# Altium PCB controller_board.PcbDoc
Units mm, origin at the board's own origin, x right, y up, seen from the top; angles counter-clockwise.
Board outline 35.05 x 30.53 mm, 4 copper layers (Top Layer, Layer 1, Layer 2, Bottom Layer), stack 0.603 mm thick; 58 components, 56 nets, 255 pads, 108 vias.
Unrouted connection lines stored in the file: 42.
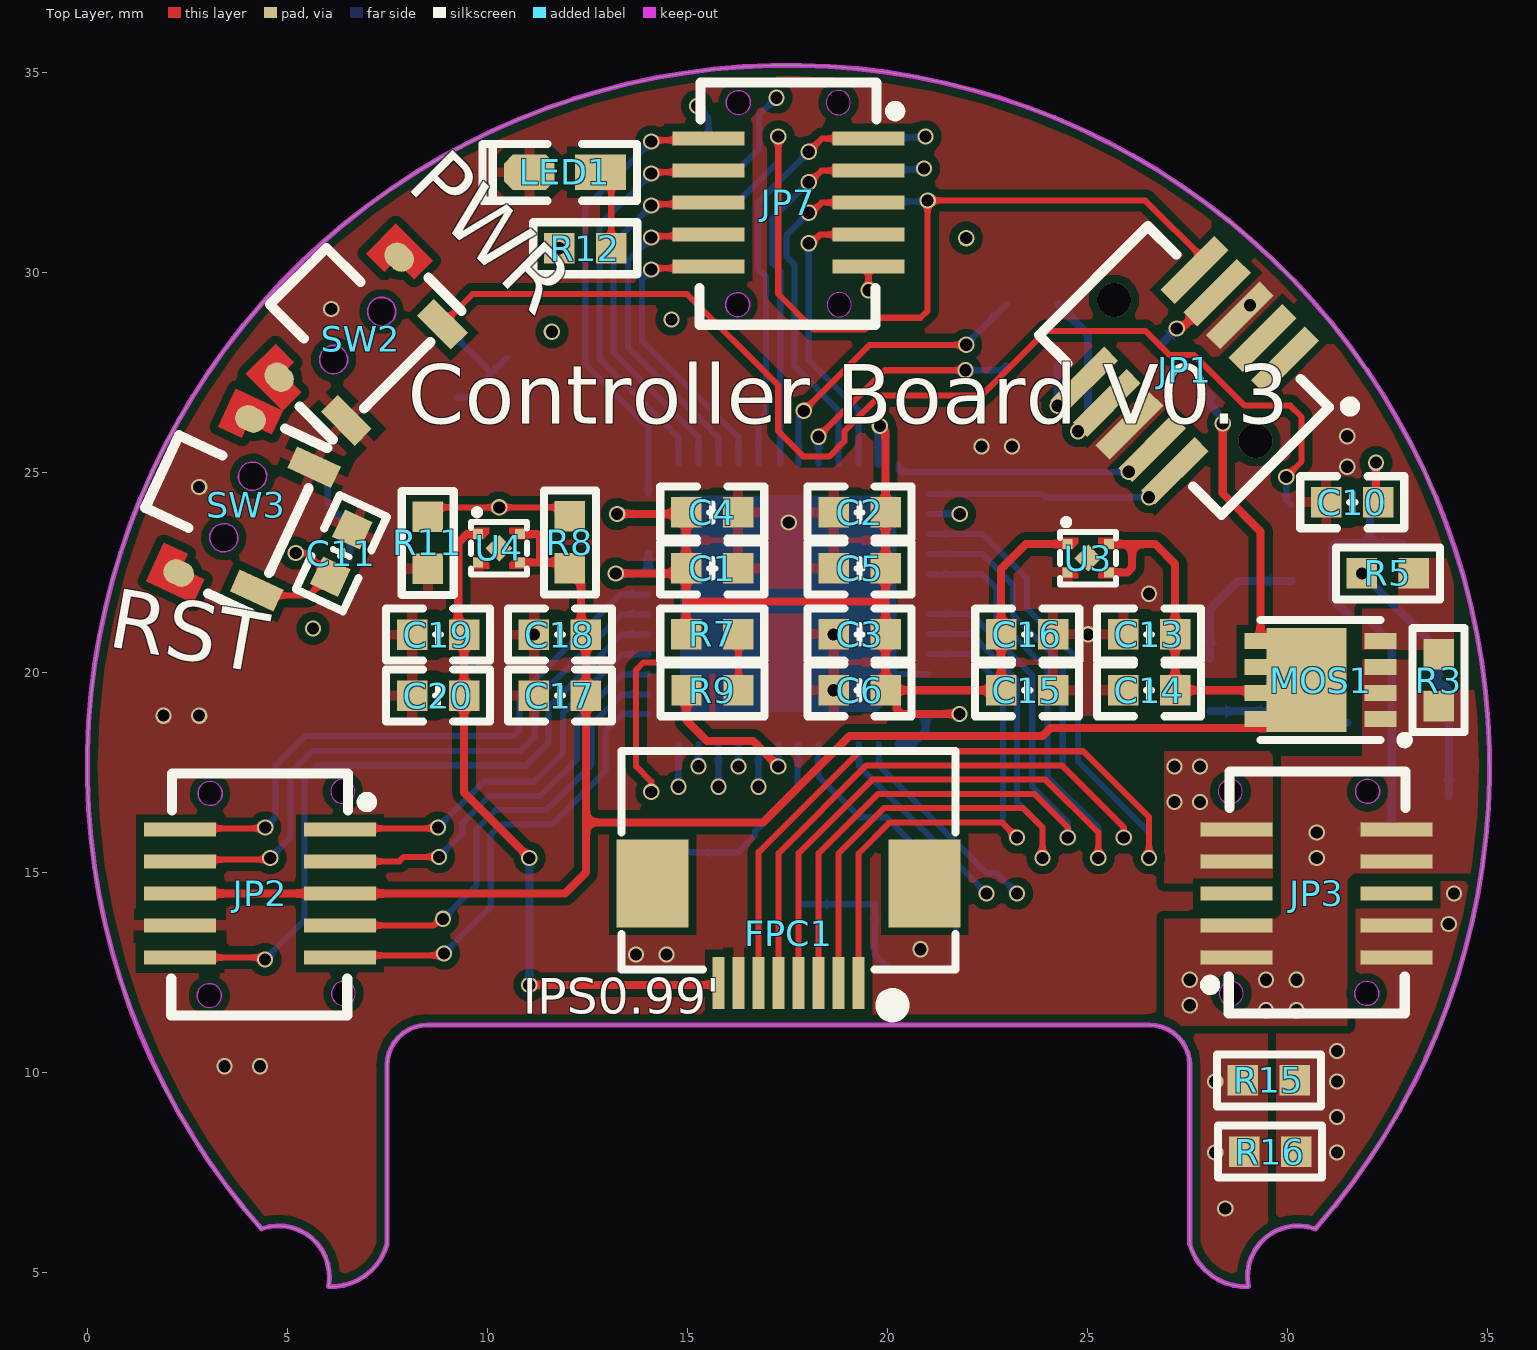
[diagram p0: Top Layer view]
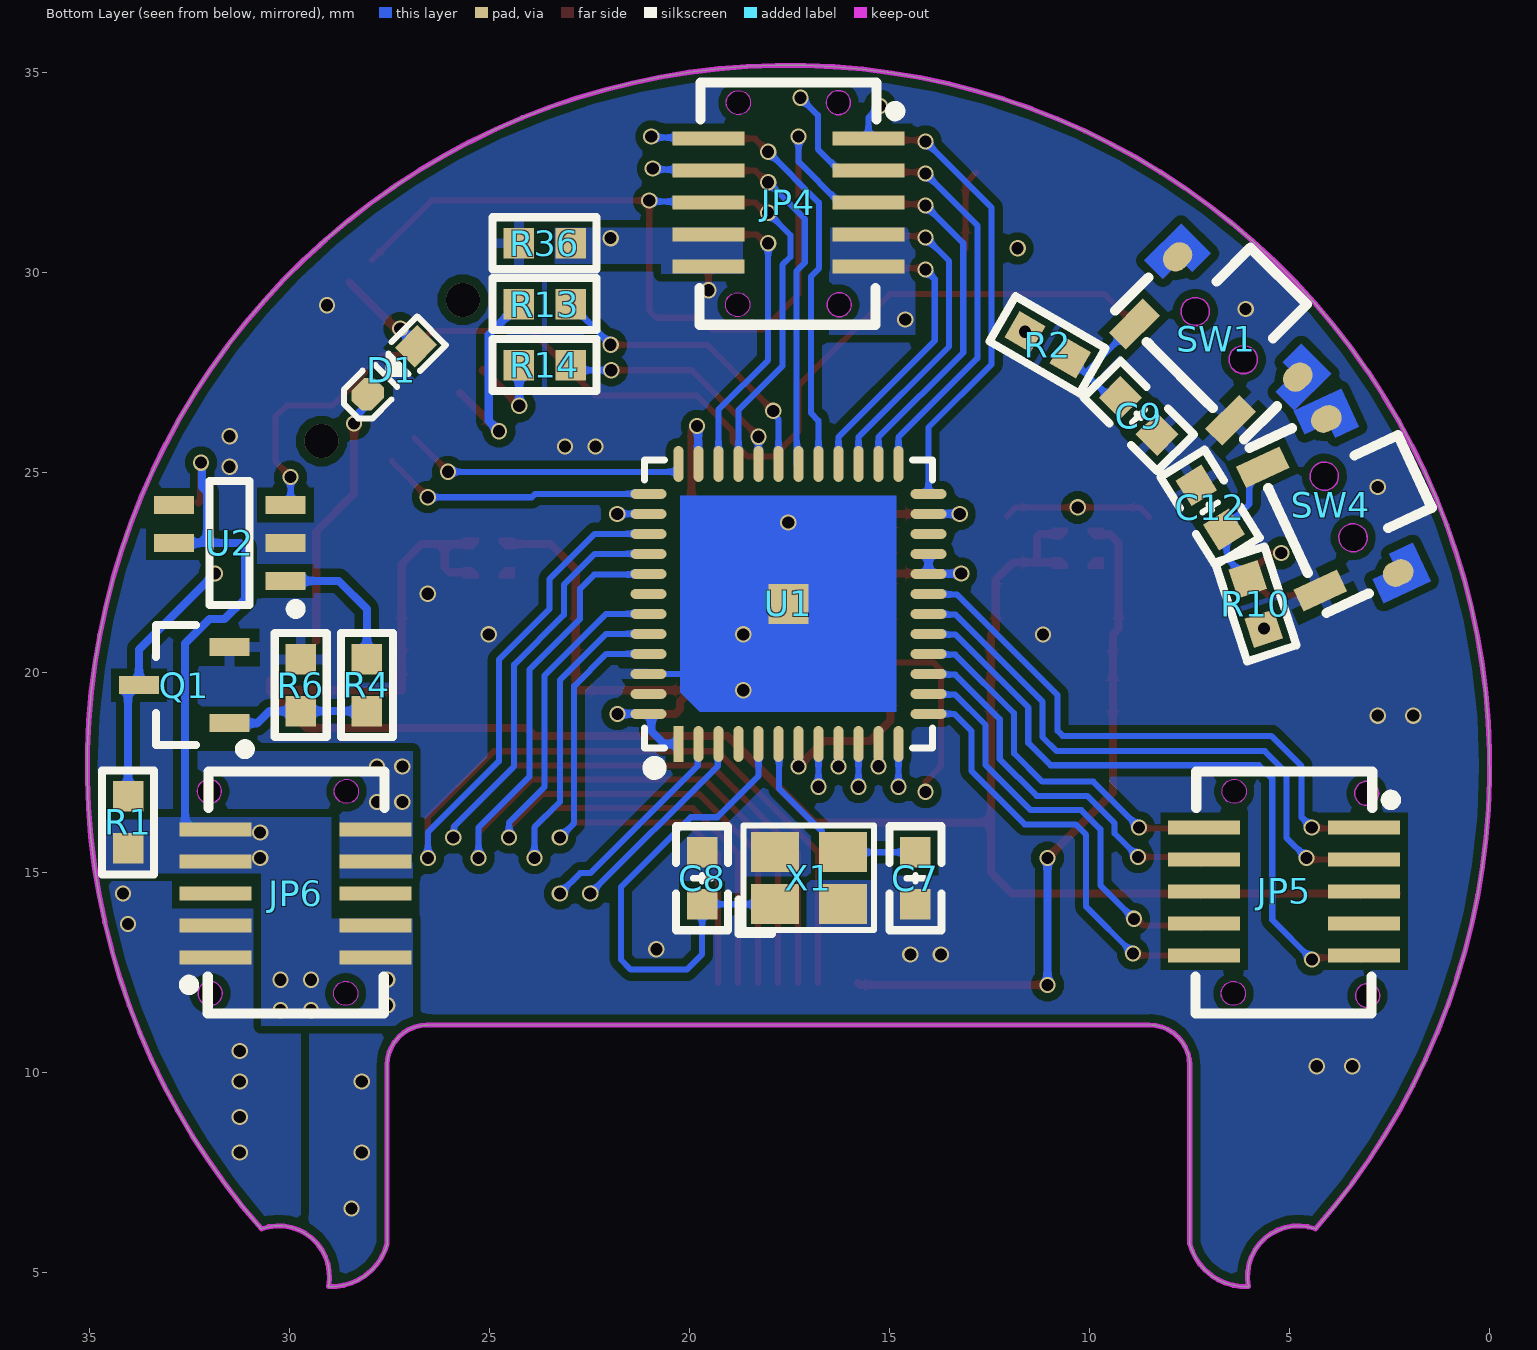
[diagram p1: Bottom Layer view, seen from below]
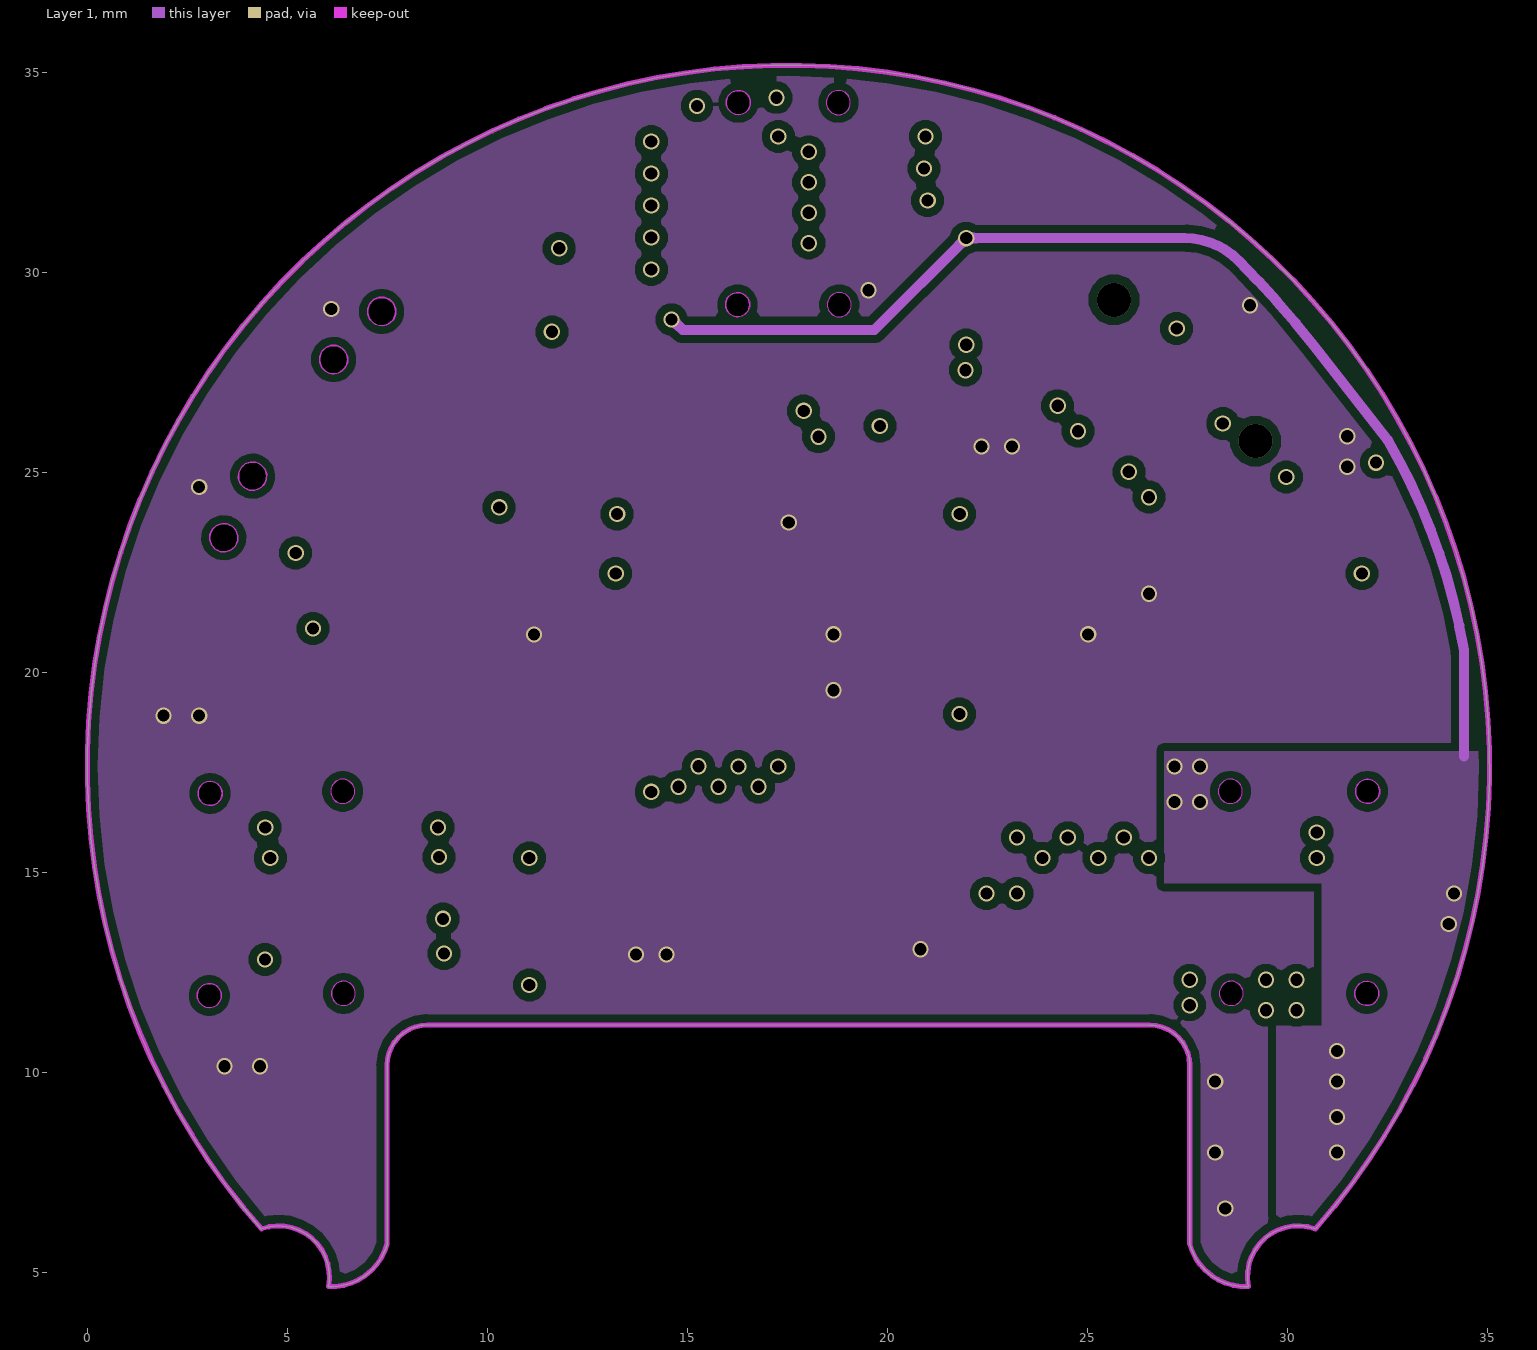
[diagram p2: Layer 1]
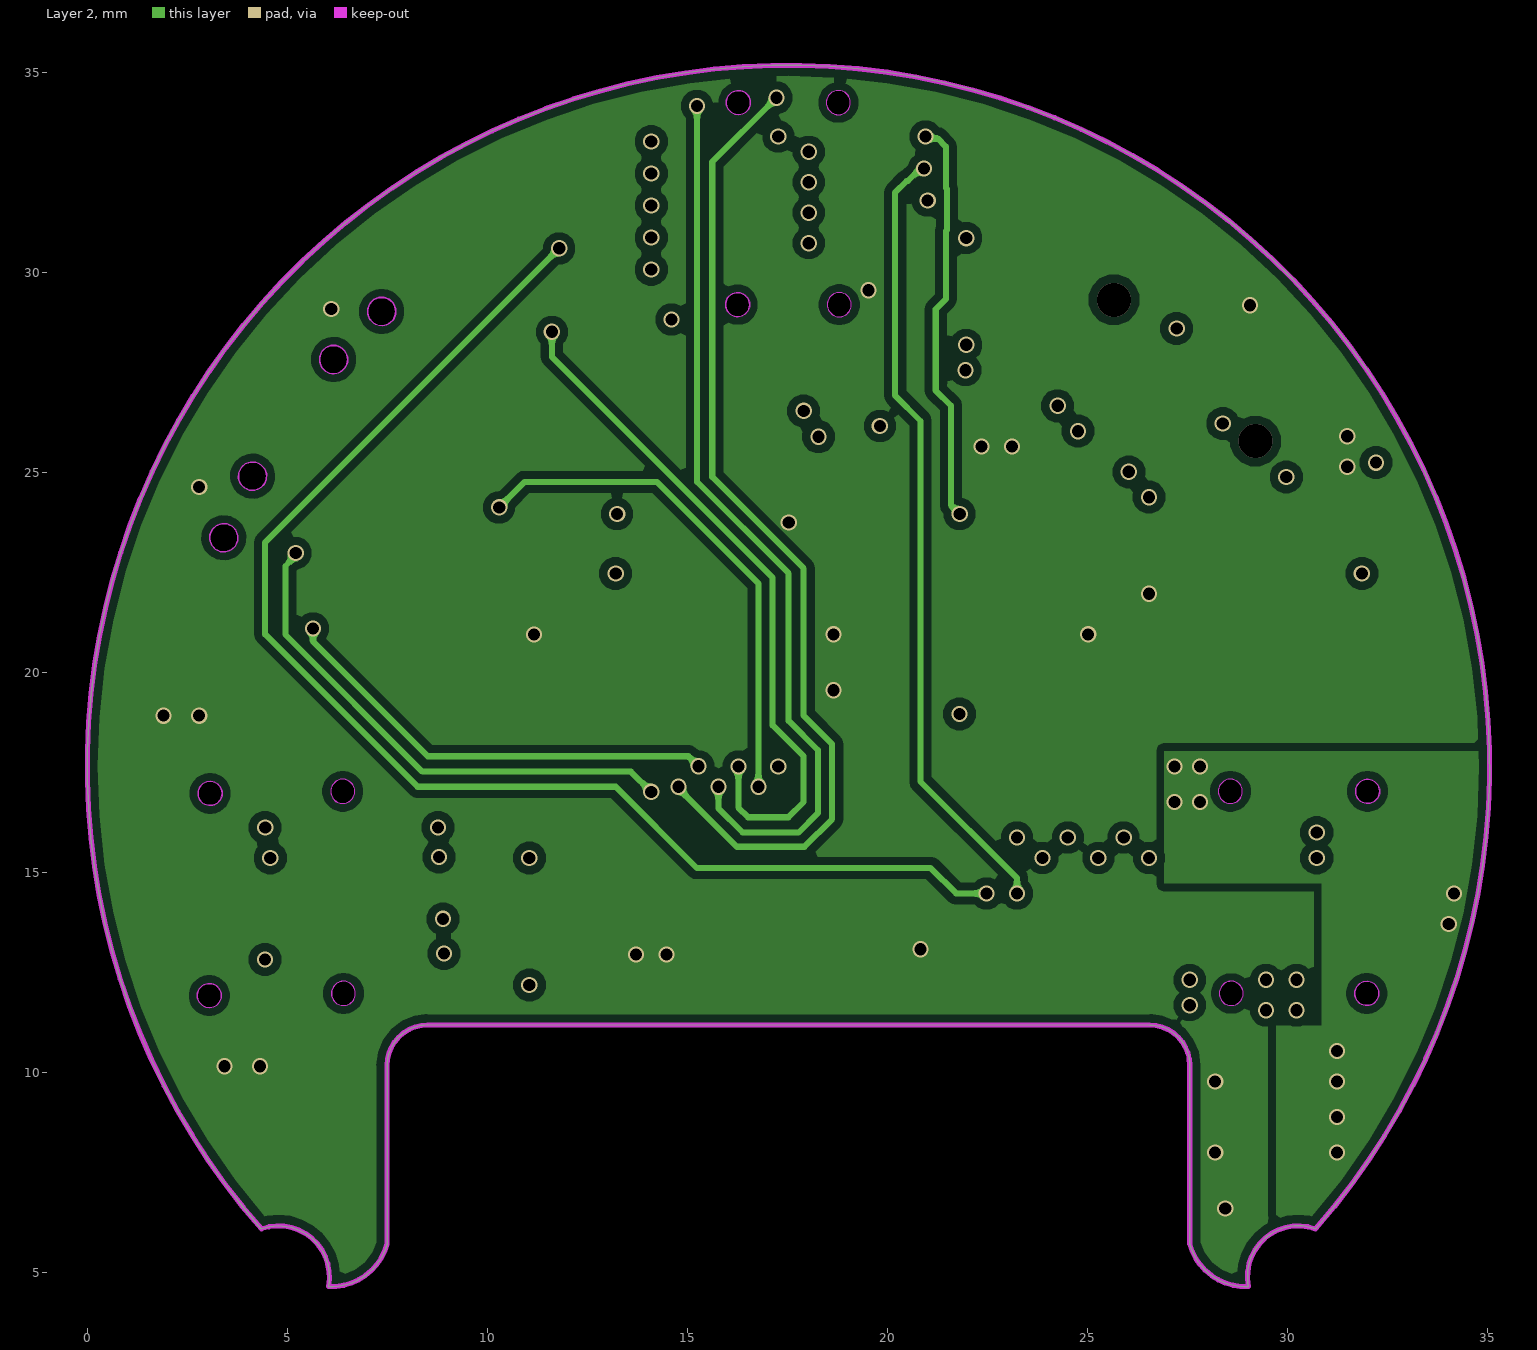
[diagram p3: Layer 2]
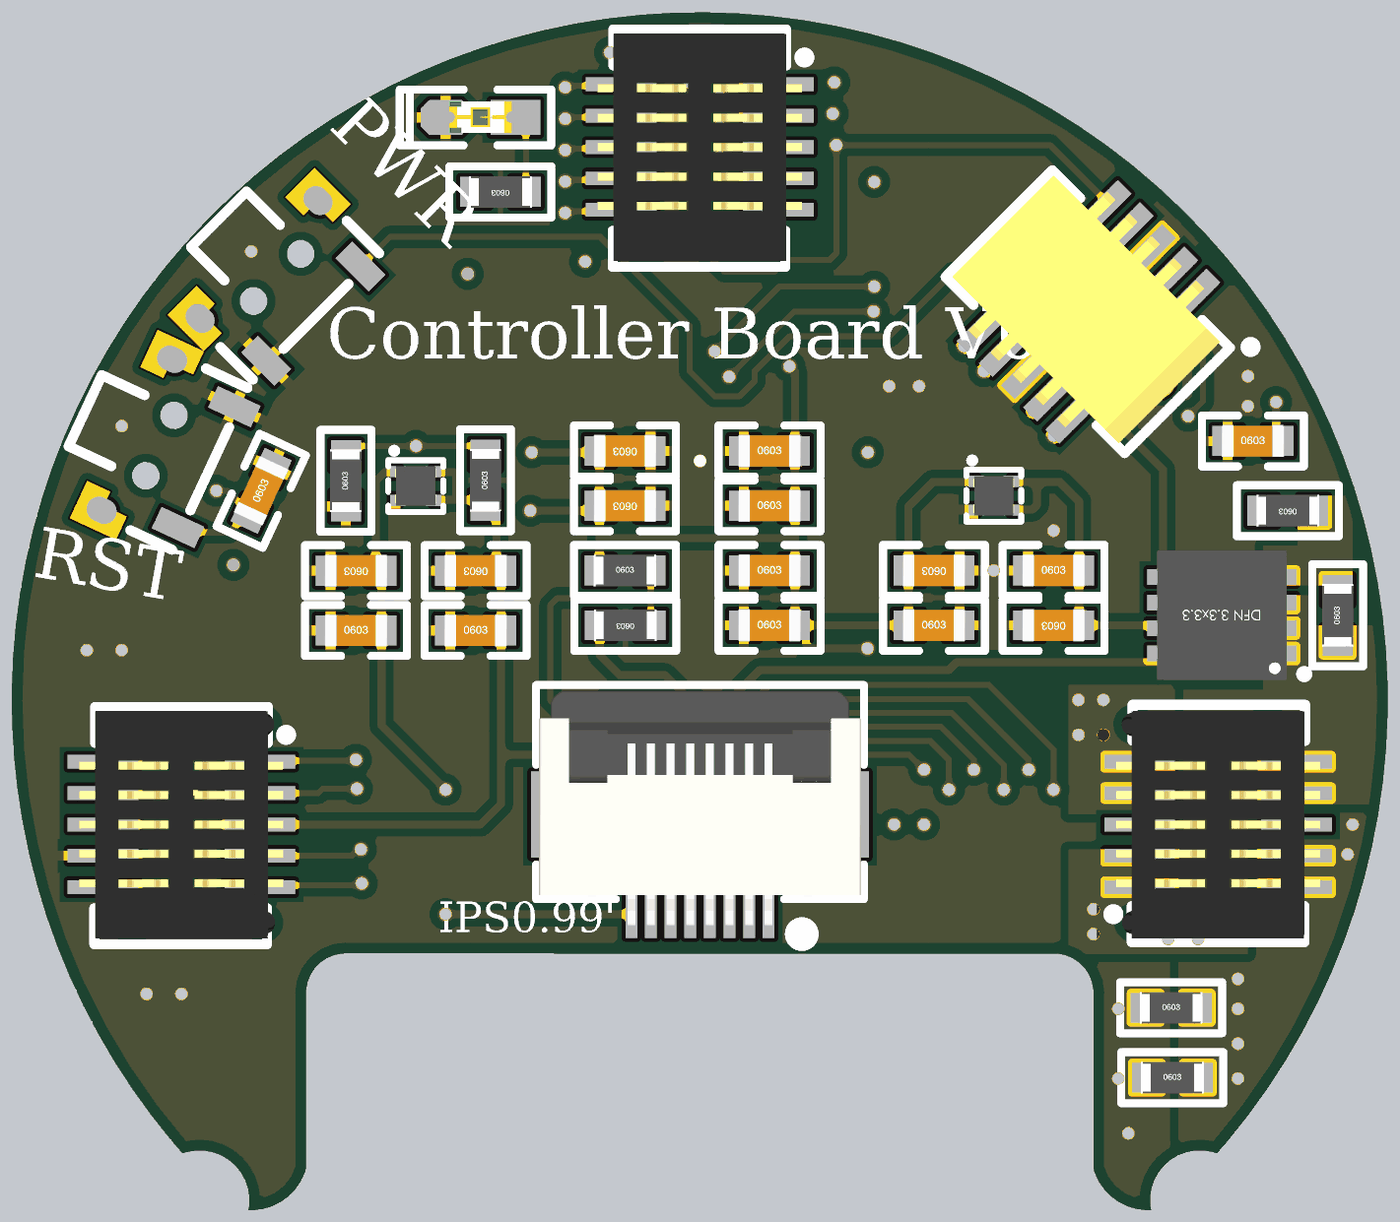
[diagram p4: 3D render of the assembled board from above, using the file's embedded part models]
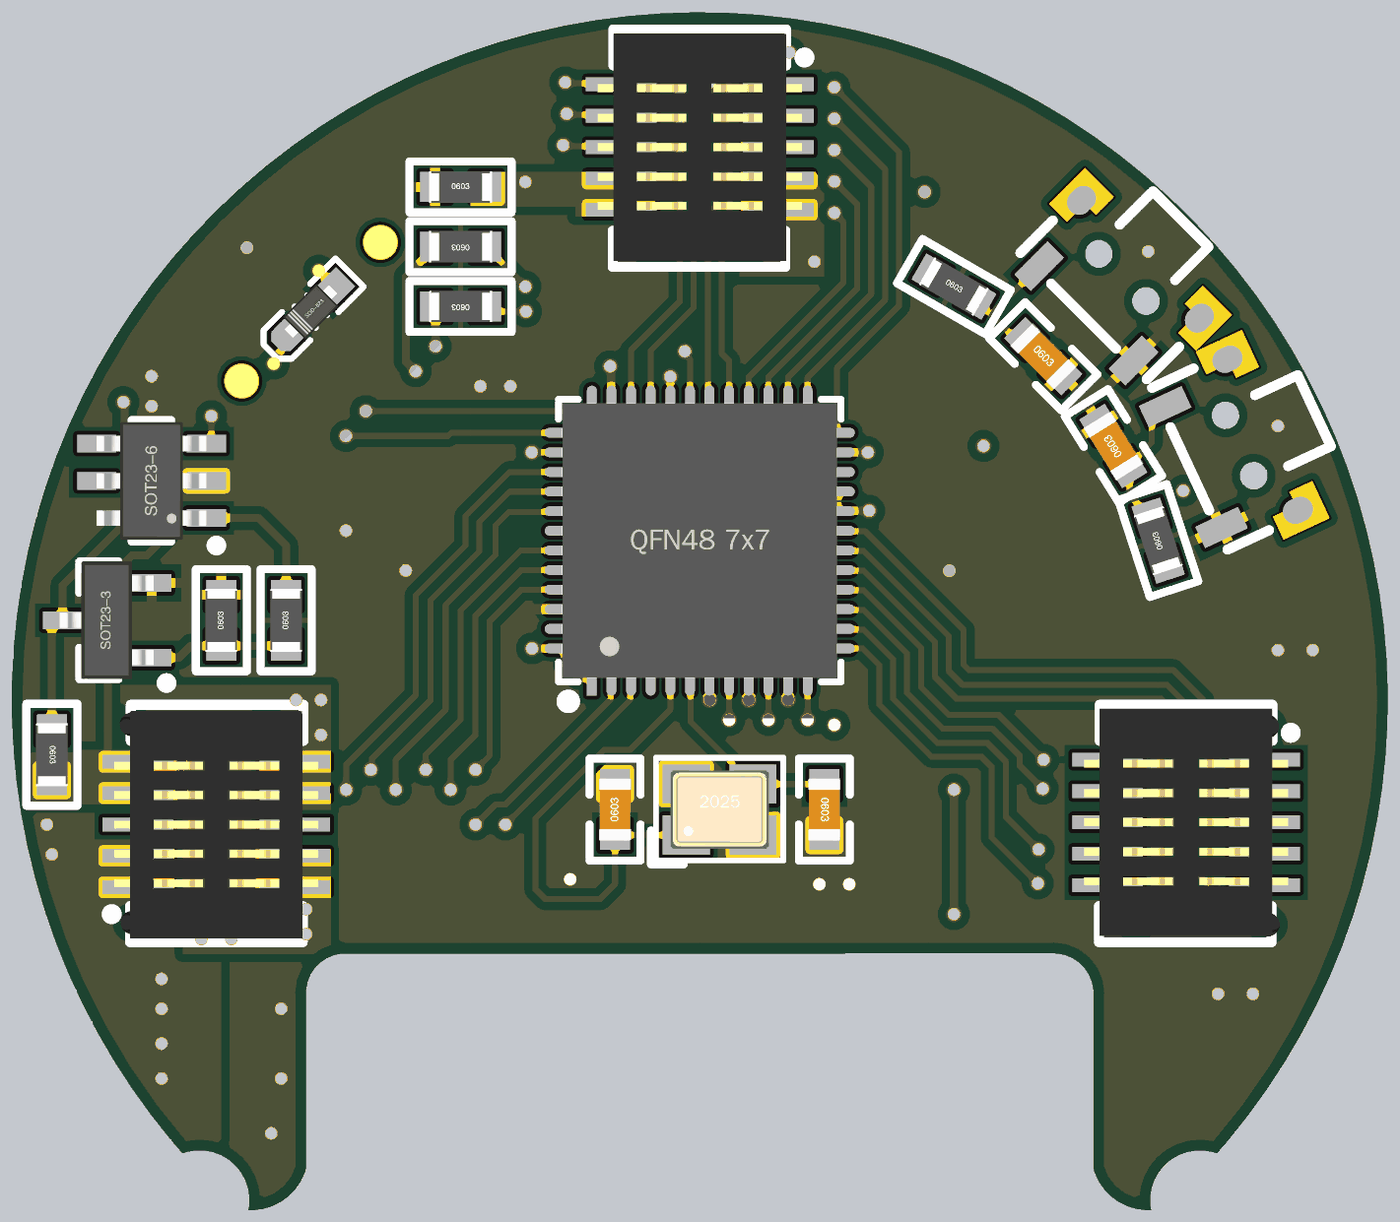
[diagram p5: 3D render of the assembled board from below, using the file's embedded part models]

## Layer stack, top to bottom
Top Solder: solder mask 0.0102, Solder Resist, Dk 3.5
Top Layer: signal copper 0.0356
Dielectric 2: prepreg 0.0711, PP-006, Dk 4.1
Layer 1: signal copper 0.035
Dielectric 1: dielectric 0.32, FR-4, Dk 4.8
Layer 2: signal copper 0.035
Dielectric 3: prepreg 0.0711, PP-006, Dk 4.1
Bottom Layer: signal copper 0.0356
Bottom Solder: solder mask 0.0102, Solder Resist, Dk 3.5

## Board outline
4.348,6.092 cw(c4.78,4.898) 6.024,4.65 ccw(c6.096,6.096) 7.493,5.715 7.493,10.176 cw(c8.509,10.176) 8.509,11.192 26.556,11.188 cw(c26.556,10.185) 27.559,10.185 27.559,5.715 ccw(c28.956,6.096) 29.028,4.65 cw(c30.271,4.901) 30.705,6.094 ccw(c17.526,17.653) 16.385,35.146 ccw(c17.526,17.653)

## Design rules (kind name [scope] priority, off if disabled: settings)
Clearance [All] p1: gap=0.203 ignorepadtopadclearanceinfootprint=TRUE except(0: Arc-Hole Track-Hole SMDPad-Hole THPad-Hole Via-Hole Fill-Hole Poly-Hole Region-Hole Text-Hole)
PolygonConnect [All] p1: connectstyle=Relief reliefconductorwidth=0.254 reliefentries=4 polygonreliefangle="90 Angle" airgapwidth=0.254
RoutingVias [All] p1: holewidth=0.711 width=1.27 viastyle="Through Hole" minholewidth=0.711 minwidth=1.27 maxholewidth=0.711 maxwidth=1.27
SolderMaskExpansion [All] p1: expansion=0.102 istentingtop=FALSE
Width [All] p1: maxlimit=0.508 minlimit=0.152 preferedwidth=0.203 minimp=50.000000 maximp=50.000000 favimp=50.000000
30 further rules are at their usual default settings.

## Components (designator, comment, footprint, x,y, rotation, side; value= is the part's Value field where it differs from the comment)
C1 "0.1uF" "C 0603_L" 15.621,22.606 r180 top
C2 "0.1uF" "C 0603_L" 19.304,24.003 r0 top
C3 "0.1uF" "C 0603_L" 19.304,20.955 r0 top
C4 "0.1uF" "C 0603_L" 15.621,24.003 r180 top
C5 "0.1uF" "C 0603_L" 19.304,22.606 r0 top
C6 "4.7uF" "C 0603_L" 19.304,19.558 r0 top
C7 "22pF" "C 0603_L" 14.351,14.859 r270 bottom
C8 "22pF" "C 0603_L" 19.685,14.859 r90 bottom
C9 "0.1uF" "C 0603_L" 8.77,26.416 r225 bottom
C10 "0.1uF" "C 0603_L" 31.623,24.257 r0 top
C11 "0.1uF" "C 0603_L" 6.35,22.987 r65 top
C12 "0.1uF" "C 0603_L" 6.985,24.13 r58 bottom
C13 "1uF" "C 0603_L" 26.543,20.955 r0 top
C14 "0.1uF" "C 0603_L" 26.543,19.558 r180 top
C15 "0.1uF" "C 0603_L" 23.495,19.558 r0 top
C16 "1uF" "C 0603_L" 23.495,20.955 r180 top
C17 "1uF" "C 0603_L" 11.815,19.425 r0 top
C18 "0.1uF" "C 0603_L" 11.815,20.949 r180 top
C19 "0.1uF" "C 0603_L" 8.767,20.949 r180 top
C20 "1uF" "C 0603_L" 8.767,19.425 r0 top
D1 "B5919WS" SOD-523 27.439,27.559 r315 bottom
FPC1 "8P" "FPC0.5 2H-WS-8P" 17.533,14.732 r180 top
JP1 "Header 5*2" BTB-0.8MM-SMD-BF-2*5PIN 27.432,27.552 r225 top
JP2 "Header 5*2" BTB-0.8mm-SMD-F-2*5PIN 4.318,14.478 r270 top locked
JP3 "Header 5*2" BTB-0.8mm-SMD-F-2*5PIN 30.734,14.478 r90 top locked
JP4 "Header 5*2" BTB-0.8mm-SMD-F-2*5PIN 17.526,31.75 r270 bottom locked
JP5 "Header 5*2" BTB-0.8mm-SMD-F-2*5PIN 5.133,14.531 r270 bottom locked
JP6 "Header 5*2" BTB-0.8mm-SMD-F-2*5PIN 29.845,14.478 r90 bottom locked
JP7 "Header 5*2" BTB-0.8mm-SMD-F-2*5PIN 17.526,31.75 r270 top locked
LED1 "红色" "LED 0603G" 11.938,32.512 r180 top
MOS1 "AON7403" DFN3x3_8 30.83,19.812 r90 top
Q1 "SS8050" SOT23-3L 32.639,19.685 r90 bottom
R1 "47K" "R 0603_L" 34.036,16.256 r270 bottom
R2 "1K" "R 0603_L" 11.049,28.194 r210 bottom
R3 "47K" "R 0603_L" 33.782,19.812 r90 top
R4 "100R" "R 0603_L" 28.067,19.685 r90 bottom
R5 "100R" "R 0603_L" 32.512,22.479 r180 top
R6 "47K" "R 0603_L" 29.718,19.685 r90 bottom
R7 "10K" "R 0603_L" 15.621,20.955 r0 top
R8 "20K" "R 0603_L" 12.065,23.256 r90 top
R9 "100R" "R 0603_L" 15.628,19.558 r180 top
R10 "1K" "R 0603_L" 5.842,21.717 r72 bottom
R11 "20K" "R 0603_L" 8.509,23.241 r90 top
R12 "10K" "R 0603_L" 12.446,30.607 r180 top
R13 "100R" "R 0603_L" 23.622,29.21 r0 bottom
R14 "100R" "R 0603_L" 23.622,27.686 r0 bottom
R15 "0R" "R 0603_L" 29.539,9.805 r0 top
R16 "0R" "R 0603_L" 29.569,8.023 r0 top
R36 "0R" "R 0603_L" 23.622,30.734 r180 bottom
SW1 "3x6x5" "TSW 2*4*3.5-S-W" 6.985,28.201 r225 bottom
SW2 "3x6x5" "TSW 2*4*3.5-S-W" 6.985,28.194 r45 top
SW3 "3x6x5" "TSW 2*4*3.5-S-W" 4.064,24.003 r65 top
SW4 "3x6x5" "TSW 2*4*3.5-S-W" 4.064,24.003 r245 bottom
U1 "STM32G431CBU6" "QFN48 7X7_L" 17.526,21.717 r180 bottom
U2 "EC190708" SOT23-6L 31.496,23.241 r90 bottom
U3 "RS3236" UTDFN1x1-4 25.019,22.86 r270 top
U4 "RS3236" UTDFN1x1-4 10.291,23.108 r270 top
X1 "8M" "OSC 2025-4P" 17.018,14.859 r180 bottom

## Footprints (in the part's own frame and the unit in brackets; to place one, negate y for a bottom-side part, rotate by r counter-clockwise, add the part's x,y. Pads: shape width x height; smd on the part's side, far side on the other; paste and mask are expansions set on the pad)
BTB-0.8MM-SMD-BF-2*5PIN [mm] "0.8侧插板对板母座，10PIN"
  rect 1.9x0.5 smd: 1(-1.95,1.6) 2(1.95,1.6) 3(-1.95,0.8) 4(1.95,0.8) 5(-1.95,0) 6(1.95,0) 7(-1.95,-0.8) 8(1.95,-0.8) 9(-1.95,-1.6) 10(1.95,-1.6)
  silkscreen extent -2.41,-3.2 1.95,3.68, body extent -2.5,-3.08 2.5,2.92, height 5.18
BTB-0.8mm-SMD-F-2*5PIN [mm] "0.8双槽插板对板母座，10PIN"
  rect 0.35x1.8 smd: 1(-1.6,2) 2(-1.6,-2) 3(-0.8,2) 4(-0.8,-2) 5(0,2) 6(0,-2) 7(0.8,2) 8(0.8,-2) 9(1.6,2) 10(1.6,-2)
  Keep-Out Layer board cut-out: -2.2,-1.25 -2.2,-1.31 -2.246,-1.42 -2.33,-1.504 -2.44,-1.55 -2.56,-1.55 -2.67,-1.504 -2.754,-1.42 -2.8,-1.31 -2.8,-1.25 -2.8,-1.19 -2.754,-1.08 -2.67,-0.996 -2.56,-0.95 -2.44,-0.95 -2.33,-0.996 -2.246,-1.08 -2.2,-1.19 -2.2,-1.25 -2.2,-1.25
  Keep-Out Layer board cut-out: 2.853,-1.27 2.853,-1.33 2.807,-1.44 2.723,-1.524 2.613,-1.57 2.493,-1.57 2.383,-1.524 2.299,-1.44 2.253,-1.33 2.253,-1.27 2.253,-1.21 2.299,-1.1 2.383,-1.016 2.493,-0.97 2.613,-0.97 2.723,-1.016 2.807,-1.1 2.853,-1.21 2.853,-1.27 2.853,-1.27
  Keep-Out Layer circle w0.025: c-2.5,-1.25 r0.3
  Keep-Out Layer circle w0.025: c2.553,-1.27 r0.3
  Keep-Out Layer region: -2.2,-1.25 -2.2,-1.31 -2.246,-1.42 -2.33,-1.504 -2.44,-1.55 -2.56,-1.55 -2.67,-1.504 -2.754,-1.42 -2.8,-1.31 -2.8,-1.25 -2.8,-1.19 -2.754,-1.08 -2.67,-0.996 -2.56,-0.95 -2.44,-0.95 -2.33,-0.996 -2.246,-1.08 -2.2,-1.19 -2.2,-1.25 -2.2,-1.25
  Keep-Out Layer region: 2.853,-1.27 2.853,-1.33 2.807,-1.44 2.723,-1.524 2.613,-1.57 2.493,-1.57 2.383,-1.524 2.299,-1.44 2.253,-1.33 2.253,-1.27 2.253,-1.21 2.299,-1.1 2.383,-1.016 2.493,-0.97 2.613,-0.97 2.723,-1.016 2.807,-1.1 2.853,-1.21 2.853,-1.27 2.853,-1.27
  silkscreen extent -3,-2.22 3.05,2.79, body extent -2.9,-2.6 2.9,2.6, height 3.9
"C 0603_L" [mil] "无极性贴片电容                                       淘宝ID:黄晶宝石"
  rect 30x30 smd: 1(-25.59,0) 2(25.59,0)
  silkscreen extent -51,-26 51,26, body extent -31,-16 31,16, height 32
DFN3x3_8 [mm] "8PIN L3.0-W3.0-P0.65"
  rect 0.4x0.8 smd: 1(-0.975,-1.5) 1(-0.325,-1.5) 1(0.325,-1.5) 2(0.975,-1.5) 3(-0.975,1.5) 3(-0.325,1.5) 3(0.325,1.5) 3(0.975,1.5)
  rect 2.6x2 smd: 3(0,0.35)
  silkscreen extent -1.6,-2.2 1.5,1.5, body extent -1.65,-1.66 1.65,1.66, height 0.75
"FPC0.5 2H-WS-8P" [mm] "长：8.2mm，宽：5.2mm，高：2mm 淘宝ID:黄晶宝石   店铺网址:https://shop463601444.taobao.com"
  rect 1.8x2.2 smd: 0(-3.4,0) 0(3.4,0)
  rect 0.3x1.3 smd: 1(-1.75,2.497) 2(-1.25,2.497) 3(-0.75,2.497) 4(-0.25,2.497) 5(0.25,2.497) 6(0.75,2.497) 7(1.25,2.497) 8(1.75,2.497)
  silkscreen extent -4.17,-3.3 4.17,3.23, body extent -4.1,-3.15 4.1,2.85, height 2
"LED 0603G" [mil] "绿色0603LED                                   淘宝ID:黄晶宝石"
  rect 50x35 smd: 1(-35,0.26)
  oct 50x35 smd: 2(35,0.26)
  silkscreen extent -71,-28 81,28, body extent -31,-16 32,16, height 18
"OSC 2025-4P" [mm] "2*2.5*0.55mm(长宽高)                    淘宝ID:黄晶宝石"
  rect 1.2x1 smd: 1(-0.85,-0.65) 2(0.85,-0.65) 3(0.85,0.65) 4(-0.85,0.65)
  silkscreen extent -1.75,-1.4 1.63,1.32, body extent -1.25,-1 1.25,1, height 0.55
"QFN48 7X7_L" [mm] "48脚，长x宽x高：7x7x1mm，脚距：0.5mm"
  rect 0.25x0.9 smd: 1(-2.75,-3.5)
  oval 0.25x0.9 smd: 2(-2.25,-3.5) 3(-1.75,-3.5) 4(-1.25,-3.5) 5(-0.75,-3.5) 6(-0.25,-3.5) 7(0.25,-3.5) 8(0.75,-3.5) 9(1.25,-3.5) 10(1.75,-3.5) 11(2.25,-3.5) 12(2.75,-3.5) 25(2.75,3.5) 26(2.25,3.5) 27(1.75,3.5) 28(1.25,3.5) 29(0.75,3.5) 30(0.25,3.5) 31(-0.25,3.5) 32(-0.75,3.5) 33(-1.25,3.5) 34(-1.75,3.5) 35(-2.25,3.5) 36(-2.75,3.5)
  oval 0.9x0.25 smd: 13(3.5,-2.75) 14(3.5,-2.25) 15(3.5,-1.75) 16(3.5,-1.25) 17(3.5,-0.75) 18(3.5,-0.25) 19(3.5,0.25) 20(3.5,0.75) 21(3.5,1.25) 22(3.5,1.75) 23(3.5,2.25) 24(3.5,2.75) 37(-3.5,2.75) 38(-3.5,2.25) 39(-3.5,1.75) 40(-3.5,1.25) 41(-3.5,0.75) 42(-3.5,0.25) 43(-3.5,-0.25) 44(-3.5,-0.75) 45(-3.5,-1.25) 46(-3.5,-1.75) 47(-3.5,-2.25) 48(-3.5,-2.75)
  rect 1x1 smd mask+0.051: 49(0,0)
  Top Layer region: -2.7,2.7 2.7,2.7 2.7,-2.7 -2.214,-2.7 -2.7,-2.214
  silkscreen extent -3.6,-4.25 3.6,3.6, body extent -3.51,-3.51 3.51,3.51, height 0.95
"R 0603_L" [mil] "1/10W贴片电阻                 淘宝ID:黄晶宝石"
  rect 30x30 smd: 1(-25.59,0) 2(25.59,0)
  silkscreen extent -51,-26 51,26, body extent -31,-16 31,16, height 16
SOD-523 [mm] "1.2x0.8X0.6mm（长宽高，不包括引脚）"
  rect 0.8x0.7 smd: 1(-0.85,0)
  oct 0.8x0.7 smd: 2(0.85,0)
  silkscreen extent -1.4,-0.51 1.45,0.51, body extent -0.8,-0.4 0.8,0.4, height 0.65
SOT23-3L [mm] "3x1.3x1mm(长宽高)    封装库来自淘宝卖家 ID：黄晶宝石"
  rect 0.45x1 smd: 1(-0.95,-1.143) 2(0.95,-1.143) 3(0,1.125)
  silkscreen extent -1.72,-1.65 1.5,0.7, body extent -1.5,-1.2 1.5,1.2, height 1.05
SOT23-6L [mm] "3x1.6x1.1mm(长宽高) 封装库来自淘宝卖家 ID：黄晶宝石"
  rect 0.45x1 smd: 1(-0.95,-1.397) 2(0,-1.397) 3(0.95,-1.397) 4(0.95,1.397) 5(0,1.397)
  rect 0.45x1 on Mech15: 6(-0.95,1.397)
  silkscreen extent -1.77,-1.78 1.55,0.51, body extent -1.5,-1.4 1.5,1.4, height 1.15
"TSW 2*4*3.5-S-W" [mm] "侧立贴片2*4*3.5mm"
  oval 0.63x0.78 smd: 0(-2.125,0.975) 0(2.125,0.975)
  rect 0.6x1.2 smd: 1(-1.7,-0.975) 2(1.7,-0.975)
  Top Layer region: 2.65,0.325 2.65,1.625 1.6,1.625 1.6,0.975 1.6,0.975 2,0.975 2,0.325 2.65,0.325
  Top Layer region: -1.6,0.975 -1.6,1.625 -2.65,1.625 -2.65,0.325 -2,0.325 -2,0.975 -1.6,0.975 -1.6,0.975
  Keep-Out Layer board cut-out: -0.5,0.325 -0.5,0.255 -0.553,0.127 -0.652,0.028 -0.78,-0.025 -0.92,-0.025 -1.048,0.028 -1.147,0.127 -1.2,0.255 -1.2,0.325 -1.2,0.395 -1.147,0.523 -1.048,0.622 -0.92,0.675 -0.78,0.675 -0.652,0.622 -0.553,0.523 -0.5,0.395 -0.5,0.325 -0.5,0.325
  Keep-Out Layer board cut-out: 1.2,0.325 1.2,0.255 1.147,0.127 1.048,0.028 0.92,-0.025 0.78,-0.025 0.652,0.028 0.553,0.127 0.5,0.255 0.5,0.325 0.5,0.395 0.553,0.523 0.652,0.622 0.78,0.675 0.92,0.675 1.048,0.622 1.147,0.523 1.2,0.395 1.2,0.325 1.2,0.325
  Keep-Out Layer circle w0.005: c-0.85,0.325 r0.35
  Keep-Out Layer circle w0.005: c0.85,0.325 r0.35
  Keep-Out Layer region: -0.5,0.325 -0.5,0.255 -0.553,0.127 -0.652,0.028 -0.78,-0.025 -0.92,-0.025 -1.048,0.028 -1.147,0.127 -1.2,0.255 -1.2,0.325 -1.2,0.395 -1.147,0.523 -1.048,0.622 -0.92,0.675 -0.78,0.675 -0.652,0.622 -0.553,0.523 -0.5,0.395 -0.5,0.325 -0.5,0.325
  Keep-Out Layer region: 1.2,0.325 1.2,0.255 1.147,0.127 1.048,0.028 0.92,-0.025 0.78,-0.025 0.652,0.028 0.553,0.127 0.5,0.255 0.5,0.325 0.5,0.395 0.553,0.523 0.652,0.622 0.78,0.675 0.92,0.675 1.048,0.622 1.147,0.523 1.2,0.395 1.2,0.325 1.2,0.325
  silkscreen extent -2.28,-1.07 2.28,2.43, body extent -2.28,-1.25 2.27,2.35, height 1.82
UTDFN1x1-4 [mm]
  rect 0.25x0.25 smd: 1(-0.354,-0.52) 2(0.354,-0.52) 3(0.354,0.52) 4(-0.354,0.52)
  rect 0.48x0.48 smd rot 45: ""(0,0)
  Top Layer region: -0.508,-0.65 -0.225,-0.65 -0.225,-0.4 -0.375,-0.25 -0.508,-0.25
  Top Layer region: 0.508,-0.65 0.225,-0.65 0.225,-0.4 0.375,-0.25 0.508,-0.25
  Top Layer region: 0.508,0.65 0.225,0.65 0.225,0.4 0.375,0.25 0.508,0.25
  Top Layer region: -0.508,0.65 -0.225,0.65 -0.225,0.4 -0.375,0.25 -0.508,0.25
  silkscreen extent -0.98,-0.7 0.66,0.7, body extent -0.5,-0.52 0.5,0.52, height 0.6

## Part data
C1 C2 C3 C4 C5 C6 C7 C8 C9 C10 C11 C12 C13 C14 C15 C16 C17 C18 C19 C20: library part C, "贴片电容", BOM名称=无极性贴片电容, 淘宝ID="封装库来自淘宝 ID：黄晶宝石", 联系售后=https://shop463601444.taobao.com
D1: library part 1N5819, "肖特基二极管", BOM名称=肖特基二极管, 属性=40V/2A, 欢迎光临=https://shop463601444.taobao.com, 淘宝ID="封装库来自淘宝 ID：黄晶宝石"
JP1 JP2 JP3 JP4 JP5 JP6 JP7: "BTB Connector"
LED1: library part LED-SMD, "贴片LED", BOM名称=贴片LED, 学习资源=https://shop463601444.taobao.com, 版权归属="封装库来自淘宝 ID：黄晶宝石"
MOS1: "P沟道30V MOSFET"
Q1: library part 8050-SMD, "高频放大-NPN型", BOM名称=高频放大-NPN型, 属性="40V 1.5A 1W 100MHZ", 版权归属="封装库来自淘宝 ID：黄晶宝石", 联系售后=https://shop463601444.taobao.com
R1 R2 R3 R4 R5 R6 R7 R8 R9 R10 R11 R12 R13 R14 R15 R16 R36: library part R, "贴片电阻", BOM名称=贴片电阻, 版权归属="来自淘宝 ID：黄晶宝石", 联系售后=https://shop463601444.taobao.com
SW1 SW2 SW3 SW4: library part "TSW 3x6", "3x6轻触开关", BOM名称=3x6轻触开关, 学习资源=www.ooocke.com, 版权归属="封装库来自淘宝 ID：黄晶宝石"
U1: "带DSP和FPU的170MHz主流ARM Cortex-M4 MCU，具有128KB Flash存储器、数学加速器和中等模拟电平集成", Mfr_Name=STMicroelectronics, RefDes=RefDes, Type=Type
U2: "长按三秒开关机"
U3 U4: "500mA LDO"
X1: library part XTAL-4P, "4脚无源晶振", BOM名称=4脚无源晶振, 学习资源=www.ooocke.com, 版权归属=源创客

## Via types
v1: diameter 0.406, hole 0.305, Top Layer to Bottom Layer, tented both sides, 106 vias
v2: diameter 0.85, hole 0.85, Top Layer to Bottom Layer, 2 vias

## Nets (pads, with @x,y where several pads share a name; then routed paths per layer and width w, separated by ;. In a path a pad name is that pad's centre, name@x,y a point inside that pad or via, vN(x,y) a via of type N, cw(c..) or ccw(c..) an arc to the next point about the centre after c; other vN are vias at no path point)
3V3: C19.1 C20.2 FPC1.8 U4.1 | length 17.1
  Top Layer w0.203: U4.1 9.492,23.462 9.271,23.241 9.271,21.095 C19.1 C20.2 9.417,16.999 v1(11.049,15.367) ; v1(11.049,12.192) 15.74,12.192 FPC1.8
  Bottom Layer w0.203: v1(11.049,12.192) v1(11.049,15.367)
ADC1_VBAT: R8.2 R11.2 U1.8 | length 17.7
  Top Layer w0.152: R11.2 8.748,24.13 v1(10.295,24.13) 11.841,24.13 R8.2
  Layer 2 w0.152: v1(10.295,24.13) 10.93,24.765 14.239,24.765 16.776,22.228 v1(16.776,17.145)
  Bottom Layer w0.152: v1(16.776,17.145) U1.8
AGND: JP3.2 JP3.4 JP3.7 JP3.9 JP4.7 JP4.8 JP4.9 JP4.10 JP6.1 JP6.3 JP6.8 JP6.10 R15.2 R16.2 R36.2 | length 29.5
  Layer 1 w0.254: v1(14.605,28.829) 14.619,28.829 14.881,28.567 19.677,28.567 v1(21.971,30.861) 27.432,30.861 cw(c27.432,28.969) 28.768,30.308 cw(c12.156,13.695) 30.654,28.179 32.495,25.829 cw(c32.295,25.672) 32.496,25.827 32.506,25.814 cw(c18.85,17.881) 32.515,25.799 cw(c18.85,17.881) 34.414,20.563 cw(c34.163,20.521) 34.417,20.521 34.417,17.907
  other v1: 31.242,8.001 31.242,8.89 31.242,9.779 31.242,10.541 34.036,13.716 34.163,14.478 27.178,16.764 27.813,16.764 27.178,17.653 27.813,17.653
Boost_EN: JP4.2 U1.38 | length 12.4
  Layer 2 w0.152: v1(20.955,33.401) 21.004,33.352 21.258,33.352 21.463,33.147 21.463,32.117 21.489,32.091 21.489,31.061 21.463,31.035 21.463,29.337 21.209,29.083 21.209,27.051 21.59,26.67 21.59,24.185 v1(21.808,23.967)
  Bottom Layer w0.152: JP4.2 19.551,33.376 20.93,33.376 v1(20.955,33.401) ; U1.38 v1(21.808,23.967)
CP_EN: JP4.4 U1.2 | length 26.5
  Layer 2 w0.152: v1(20.917,32.601) 20.825,32.601 20.514,32.29 20.479,32.29 20.193,32.004 20.193,26.924 20.828,26.289 20.828,17.272 23.241,14.859 v1(23.241,14.478)
  Bottom Layer w0.152: JP4.4 19.551,32.575 20.891,32.575 v1(20.917,32.601) ; U1.2 19.795,18.198 19.795,17.67 22.479,14.986 22.733,14.986 v1(23.241,14.478)
DAP_USART1_RX: R14.1 U1.32 | length 6.1
  Top Layer w0.152: v1(18.276,25.896) 19.939,27.559 v1(21.956,27.559)
  Bottom Layer w0.152: U1.32 v1(18.276,25.896) ; v1(21.956,27.559) 22.845,27.559 R14.1
DAP_USART1_TX: R13.1 U1.31 | length 7.6
  Top Layer w0.152: v1(17.907,26.543) 19.558,28.194 v1(21.971,28.194)
  Bottom Layer w0.152: U1.31 17.776,26.343 17.907,26.474 v1(17.907,26.543) ; v1(21.971,28.194) 21.971,28.209 R13.1
DGND: C1.1 C2.1 C3.1 C4.1 C5.1 C6.1 C7.2 C8.2 C9.2 C10.1 C11.2 C12.2 C13.1 C14.2 C15.2 C16.1 C17.1 C18.2 C19.2 C20.1 FPC1.7 JP1.5 JP1.6 JP2.8 JP7.9 LED1.2 Q1.2 R6.2 R11.1 R15.1 R16.1 R36.1 SW1.2 SW2.1 SW3.2 SW4.2 U1.46 U1.49 U2.2 U3.2 U4.2 X1.2 X1.4 | length 2.9
  Top Layer w0.152: v1(19.526,29.559) JP7.9
  Bottom Layer w0.152: 18.796,20.193 ccw(c19.342,20.739) 19.342,19.967 U1.46
  other v1: 28.448,6.604 28.194,8.001 28.194,9.779 3.429,10.16 4.318,10.16 13.716,12.954 14.478,12.954 20.828,13.081 1.905,18.923 2.794,18.923 18.654,19.558 11.165,20.949 18.654,20.955 25.019,20.955 26.543,21.971 17.533,23.749 2.794,24.638 31.496,25.146 22.352,25.654 23.114,25.654 31.496,25.908 6.096,29.09 29.065,29.185
IMU_INT1_ACCEL: JP7.1 U1.29 | length 10.1
  Top Layer w0.152: v1(18.034,33.02) 18.364,33.35 JP7.1
  Bottom Layer w0.152: U1.29 16.776,26.301 16.967,26.492 16.967,29.896 16.764,30.099 16.764,31.75 v1(18.034,33.02)
IMU_INT2_ACCEL: JP7.3 U1.30 | length 9.1
  Top Layer w0.152: v1(18.034,32.258) 18.061,32.258 18.353,32.55 JP7.3
  Bottom Layer w0.152: U1.30@17.323,25.217 17.323,30.043 17.12,30.246 17.12,31.344 v1(18.034,32.258)
IMU_INT3_GYRO: JP7.4 U1.25 | length 10.1
  Top Layer w0.152: v1(14.097,32.474) 14.135,32.512 15.488,32.512 JP7.4
  Bottom Layer w0.152: v1(14.097,32.474) 12.802,31.178 12.802,27.854 14.776,25.879 U1.25
IMU_INT4_GYRO: JP7.2 U1.24 | length 11.6
  Top Layer w0.152: v1(14.097,33.274) 14.135,33.312 15.488,33.312 JP7.2
  Bottom Layer w0.152: U1.24 14.026,26.126 12.446,27.706 12.446,31.623 v1(14.097,33.274)
IMU_SPI2_CSB1_ACCEL: JP7.5 U1.33 | length 8.6
  Top Layer w0.152: v1(18.034,31.496) 18.103,31.496 18.357,31.75 JP7.5
  Bottom Layer w0.152: v1(18.034,31.496) 17.475,30.937 17.475,30.394 17.678,30.19 17.678,27.661 18.776,26.563 U1.33
IMU_SPI2_CSB2_GYRO: JP7.7 U1.34 | length 7.6
  Top Layer w0.152: v1(18.034,30.734) 18.103,30.734 18.319,30.95 JP7.7
  Bottom Layer w0.152: v1(18.034,30.734) 18.034,27.813 19.276,26.571 U1.34
IMU_SPI2_MISO: JP7.8 U1.27 | length 8.3
  Top Layer w0.152: v1(14.097,30.874) 14.135,30.912 15.488,30.912 JP7.8
  Bottom Layer w0.152: v1(14.097,30.874) 13.513,30.29 13.513,28.148 15.776,25.885 U1.27
IMU_SPI2_MOSI: JP7.10 U1.28 | length 7.4
  Top Layer w0.152: v1(14.097,30.074) 14.135,30.112 15.488,30.112 JP7.10
  Bottom Layer w0.152: v1@14.097,30.07 13.868,29.841 13.868,28.296 16.276,25.888 U1.28
IMU_SPI2_SCK: JP7.6 U1.26 | length 9.2
  Top Layer w0.152: v1(14.097,31.674) 14.135,31.712 15.488,31.712 JP7.6
  Bottom Layer w0.152: v1(14.097,31.674) 13.157,30.734 13.157,28.001 15.276,25.882 U1.26
IPS_GPIO_BLK: FPC1.1 U1.45 | length 13.8
  Top Layer w0.152: FPC1.1 19.283,15.477 20.061,16.256 22.86,16.256 v1(23.241,15.875)
  Bottom Layer w0.152: U1.45 22.078,20.467 22.885,19.66 22.885,16.231 v1(23.241,15.875)
IPS_GPIO_D/C: FPC1.6 U1.39 | length 27
  Top Layer w0.152: FPC1.6 16.783,15.513 19.304,18.034 24.892,18.034 26.543,16.383 26.543,15.371 v1(26.539,15.367)
  Bottom Layer w0.152: U1.39 22.37,23.467 23.495,22.342 23.495,21.59 24.765,20.32 24.765,17.78 26.539,16.006 v1(26.539,15.367)
IPS_GPIO_RESET: FPC1.2 U1.44 | length 17.2
  Top Layer w0.152: FPC1.2 18.783,15.48 19.914,16.612 23.393,16.612 23.876,16.129 v1(23.876,15.367)
  Bottom Layer w0.152: U1.44 22.081,20.967 23.241,19.807 23.241,16.764 23.876,16.129 v1(23.876,15.367)
IPS_SPI3_CS: FPC1.5 U1.40 | length 23.6
  Top Layer w0.152: FPC1.5 17.283,15.489 19.472,17.678 24.359,17.678 25.908,16.129 v1(25.908,15.875)
  Bottom Layer w0.152: U1.40 22.367,22.967 23.139,22.194 23.139,21.443 24.384,20.198 24.384,17.653 25.882,16.155 25.882,15.901 v1(25.908,15.875)
IPS_SPI3_MOSI: FPC1.3 U1.43 | length 18.3
  Top Layer w0.152: FPC1.3 18.283,15.483 19.767,16.967 23.673,16.967 24.511,16.129 v1(24.511,15.875)
  Bottom Layer w0.152: U1.43 22.084,21.467 23.622,19.929 23.622,17.145 24.511,16.256 v1(24.511,15.875)
IPS_SPI3_SCK: FPC1.4 U1.41 | length 22.3
  Top Layer w0.152: FPC1.4 17.783,15.486 19.62,17.323 23.952,17.323 25.273,16.002 v1(25.273,15.367)
  Bottom Layer w0.152: U1.41 21.045,22.448 22.383,22.448 22.733,22.098 22.733,21.346 24.003,20.076 24.003,17.399 25.273,16.129 v1(25.273,15.367)
KET2_INT2: R10.1 U1.11 | length 11.8
  Layer 2 w0.152: v1(5.641,21.099) 5.641,20.775 8.509,17.907 15.025,17.907 v1(15.276,17.656)
  Bottom Layer w0.152: v1(15.276,17.656) U1.11
KEY1_INT1: R2.1 U1.9 | length 17.8
  Layer 2 w0.152: v1(11.612,28.519) 11.612,27.895 17.132,22.376 17.132,18.682 17.907,17.907 17.907,16.764 17.526,16.383 16.517,16.383 16.276,16.624 v1(16.276,17.653)
  Bottom Layer w0.152: v1(16.276,17.653) U1.9
LED1: R12.2 U1.3 | length 38.5
  Layer 2 w0.152: v1(11.796,30.607) 4.445,23.256 4.445,20.955 8.255,17.145 13.208,17.145 15.24,15.113 21.082,15.113 21.717,14.478 v1(22.479,14.478)
  Bottom Layer w0.152: U1.3 19.295,18.198 19.295,17.662 v1(22.479,14.478)
LoRa_GPIO_BUSY: JP2.10 U1.17 | length 17.7
  Top Layer w0.152: JP2.10 4.267,12.878 4.269,12.876 4.391,12.876 v1(4.439,12.827)
  Bottom Layer w0.152: v1(4.439,12.827) 5.432,13.82 5.432,17.349 5.765,17.682 10.972,17.682 11.532,18.242 11.532,19.131 13.349,20.948 14.007,20.948 U1.17
LoRa_GPIO_DI01: JP2.4 U1.18 | length 15.7
  Top Layer w0.152: JP2.4 2.363,15.322 4.527,15.322 v1(4.572,15.367)
  Bottom Layer w0.152: v1(4.572,15.367) 5.076,15.871 5.076,17.497 5.617,18.038 10.824,18.038 11.176,18.389 11.176,19.278 13.347,21.45 14.009,21.45 U1.18
LoRa_GPIO_RESET: JP2.2 U1.19 | length 15.4
  Top Layer w0.152: JP2.2 2.343,16.104 4.42,16.104 v1(4.445,16.129)
  Bottom Layer w0.152: v1(4.445,16.129) 4.699,16.383 4.699,17.653 5.461,18.415 10.668,18.415 10.799,18.546 10.799,19.435 13.317,21.953 14.012,21.953 U1.19
LoRa_SPI1_CS: JP2.1 U1.16 | length 10.1
  Top Layer w0.152: JP2.1 6.343,16.104 8.738,16.104 v1(8.763,16.129)
  Bottom Layer w0.152: v1(8.763,16.129) 9.906,17.272 11.176,17.272 11.887,17.983 11.887,18.984 13.352,20.448 14.007,20.448 U1.16
LoRa_SPI1_MISO: JP2.7 U1.14 | length 11.5
  Top Layer w0.152: JP2.7 8.657,13.678 8.821,13.843 v1(8.89,13.843)
  Bottom Layer w0.152: v1(8.89,13.843) 9.728,14.681 9.728,16.088 10.201,16.561 11.471,16.561 12.598,17.689 12.598,18.689 13.357,19.448 14.007,19.448 U1.14
LoRa_SPI1_MOSI: JP2.3 U1.15 | length 10.4
  Top Layer w0.152: JP2.3 7.8,15.278 7.913,15.391 v1(8.787,15.391)
  Bottom Layer w0.152: v1(8.787,15.391) 9.373,15.977 9.373,16.236 10.053,16.916 11.323,16.916 12.243,17.836 12.243,18.837 13.355,19.948 14.007,19.948 U1.15
LoRa_SPI1_SCK: JP2.9 U1.13 | length 11.9
  Top Layer w0.152: JP2.9 6.368,12.928 8.864,12.928 v1(8.913,12.977)
  Bottom Layer w0.152: v1(8.913,12.977) 10.084,14.148 10.084,15.941 10.348,16.205 11.618,16.205 12.954,17.541 12.954,18.542 13.379,18.967 U1.13
NetC7_1: C7.1 U1.6 X1.3 | length 5.2
  Bottom Layer w0.152: C7.1 X1.3 16.268,15.509 16.692,15.933 16.692,16.033 17.757,17.098 17.757,18.198 U1.6
NetC8_1: C8.1 U1.5 X1.1 | length 12.6
  Bottom Layer w0.152: X1.1 C8.1 19.685,12.954 20.066,12.573 21.463,12.573 21.717,12.827 21.717,14.634 19.968,16.383 19.304,16.383 18.276,17.411 U1.5
NetC9_1: C9.1 R2.2 SW1.1 | length 3.4
  Bottom Layer w0.152: SW1.1 10.104,27.486 ; C9.1 9.493,26.876 10.104,27.486 ; R2.2 10.104,27.486
NetC11_1: C11.1 R7.2 R9.1 SW3.1 | length 23.4
  Top Layer w0.152: SW3.1 4.356,21.923 5.536,21.923 6.01,22.398 C11.1 5.486,22.987 v1(5.207,22.987) ; v1(14.097,17.018) 14.097,17.272 13.716,17.653 13.716,20.066 13.903,20.253 16.278,20.253 ; R7.2 16.278,20.948 16.278,20.253 ; R9.1 16.278,20.253
  Layer 2 w0.152: v1(5.207,22.987) 5.207,22.918 4.953,22.664 4.953,20.95 8.377,17.526 13.589,17.526 v1(14.097,17.018)
NetC12_1: C12.1 R10.2 SW4.1 | length 3.4
  Bottom Layer w0.152: SW4.1 6.007,24.791 6.007,24.212 C12.1 6.567,23.505 6.567,22.859 R10.2
NetD1_1: D1.1 JP1.7 | length 2.3
  Top Layer w0.203: v1@27.29,28.542 JP1.7 JP1.7@28.499,29.751
  Bottom Layer w0.203: D1.1 26.837,28.204 v1(27.233,28.599)
NetJP1_8: JP1.8 R13.2 | length 5
  Top Layer w0.203: v1(24.765,26.035) 24.774,26.035 25.732,26.993 JP1.8@25.741,26.993
  Bottom Layer w0.203: R13.2 24.551,28.931 24.551,28.916 25.019,28.448 25.019,26.289 v1(24.765,26.035)
NetJP1_10: JP1.10 R14.2 | length 2.3
  Top Layer w0.203: v1(24.257,26.67) 25.146,27.559 JP1.10@25.176,27.559
  Bottom Layer w0.203: v1(24.257,26.67) 24.257,27.671 R14.2
NetLED1_1: LED1.1 R12.1 | length 2
  Top Layer w0.152: LED1.1 13.096,32.236 R12.1
NetMOS1_2: MOS1.2 R3.2 R5.1
NetQ1_1: Q1.1 R4.1 R6.1 | length 3.6
  Bottom Layer w0.203: R4.1 R6.1 30.495,19.035 30.795,18.735 Q1.1
NetQ1_3: Q1.3 R1.1 R5.2 | length 6.6
  Bottom Layer w0.203: v1(31.862,22.479) 33.764,20.577 Q1.3 33.913,19.685 34.036,19.562 R1.1
NetR4_2: R4.2 U2.1 | length 3.6
  Bottom Layer w0.203: R4.2 28.067,21.59 28.768,22.291 U2.1
NetR9_2: R9.2 U1.7 | length 4.1
  Top Layer w0.203: R9.2 14.978,18.804 15.494,18.288 16.637,18.288 v1(17.272,17.653)
  Bottom Layer w0.152: v1(17.272,17.653) 17.272,18.213 U1.7
NetSW2_2: SW2.2 U2.3 | length 28.9
  Top Layer w0.152: SW2.2 9.634,29.464 14.986,29.464 17.272,27.178 17.272,26.035 17.907,25.4 18.542,25.4 18.923,25.781 18.923,26.035 19.812,26.924 22.352,26.924 23.972,28.544 26.447,28.544 27.051,27.94 27.664,27.94 28.932,26.672 30.071,26.672 30.353,26.39 30.353,25.273 v1(29.972,24.892)
  Bottom Layer w0.152: v1(29.972,24.892) 29.972,24.318 U2.3
PZT_IN_A: JP4.3 U1.12 | length 28.6
  Layer 2 w0.152: v1(14.776,17.145) 14.776,17.106 16.236,15.646 17.927,15.646 18.618,16.337 18.618,18.212 17.907,18.923 17.907,22.606 15.621,24.892 15.621,32.766 v1@17.165,34.31
  Bottom Layer w0.152: v1(14.776,17.145) U1.12 ; JP4.3 16.251,32.55 16.789,33.088 16.789,33.934 v1(17.226,34.371)
PZT_IN_B: JP4.1 U1.10 | length 24.4
  Layer 2 w0.152: v1(15.24,34.163) 15.24,24.77 17.533,22.478 17.533,18.795 18.263,18.065 18.263,16.485 17.78,16.002 16.383,16.002 15.776,16.609 v1(15.776,17.145)
  Bottom Layer w0.152: v1(15.24,34.163) 15.526,33.877 JP4.1 ; v1(15.776,17.145) U1.10
SYS_SWCLK: JP1.2 U1.37 | length 6.8
  Top Layer w0.152: v1(26.543,24.384) 27.439,25.28 JP1.2@27.439,25.296
  Bottom Layer w0.152: U1.37 23.86,24.467 23.943,24.384 v1(26.543,24.384)
SYS_SWDIO: JP1.4 U1.36 | length 7.1
  Top Layer w0.152: v1(26.035,25.019) 26.035,25.024 JP1.4@26.873,25.862
  Bottom Layer w0.152: U1.36 20.276,25.064 20.321,25.019 v1(26.035,25.019)
VBAT: C10.2 JP3.1 JP3.3 JP3.8 JP3.10 JP6.2 JP6.4 JP6.7 JP6.9 MOS1.1 R1.2 R3.1 U2.5 | length 13.5
  Top Layer w0.203: v1(32.213,25.248) 32.213,24.317 C10.2
  Bottom Layer w0.203: JP6.9 32.535,16.078 32.609,16.151 32.609,20.731 32.004,21.336 31.623,21.336 31.115,21.844 31.115,23.122 31.234,23.241 32.064,23.241 ; v1(32.213,25.248) 32.185,25.22 32.185,24.639 32.064,24.518 32.064,23.241 ; U2.5 32.064,23.241
  other v1: 29.464,11.557 30.226,11.557 27.559,11.684 27.559,12.319 29.464,12.319 30.226,12.319 30.734,15.367 30.734,16.002
VBAT_CTL: C13.2 C14.1 C17.2 C18.1 D1.2 JP2.5 JP2.6 MOS1.3 R8.1 U3.3 U3.4 U4.3 U4.4 | length 56.3
  Top Layer w0.203: JP2.6 JP2.5 11.938,14.478 12.465,15.005 12.465,16.256 ; U4.3 11.917,22.754 R8.1 12.344,22.327 12.344,21.076 12.465,20.955 C17.2 12.465,16.256 ; U4.4 11.246,23.462 11.316,23.392 11.316,22.837 ; U3.3 25.999,22.506 26.118,22.625 26.118,23.214 ; U3.4 26.118,23.214 ; v1(28.385,26.228) 28.385,24.473 29.33,23.527 MOS1.3@29.33,20.787 ; 12.465,16.256 16.891,16.256 19.05,18.415 23.876,18.415 24.075,18.614 29.582,18.614 30.48,19.512 30.48,19.812 30.226,19.558 C14.1 27.193,22.718 26.697,23.214 26.118,23.214
  Bottom Layer w0.203: D1.2@28.106,26.892 D1.2 ccw(c28.638,26.958) 28.215,26.535 28.27,26.48
VCharge: JP1.9 JP4.5 JP4.6 | length 22.8
  Top Layer w0.152: v1(17.272,33.401) 17.272,29.464 18.161,28.575 19.431,28.575 19.726,28.87 20.828,28.87 21.006,29.048 v1(21.006,31.801) 26.449,31.801 JP1.9@27.933,30.317
  Bottom Layer w0.152: JP4.5 16.251,31.75 17.272,32.771 v1(17.272,33.401) ; JP4.6 19.551,31.776 20.981,31.776 v1(21.006,31.801)
VDD: C1.2 C2.2 C3.2 C4.2 C5.2 C6.2 C15.1 C16.2 R7.1 U1.1 U1.20 U1.21 U1.23 U1.35 U1.48 U3.1 | length 33.4
  Top Layer w0.203: v1(13.208,22.479) 14.844,22.479 C1.2 ; v1(13.244,23.967) 14.935,23.967 C4.2 C1.2 ; R7.1 14.971,21.78 ; v1(19.812,26.162) 19.954,26.02 C2.2 C5.2 19.954,21.78 ; v1(21.8,18.967) 20.352,18.967 20.233,19.086 20.233,19.279 C6.2 ; U3.1 23.468,23.214 22.845,22.591 C15.1 C6.2 ; 14.971,21.78 C1.2 ; 14.971,21.78 19.954,21.78 ; C6.2 C3.2 19.954,21.78
  Bottom Layer w0.203: v1(13.208,22.479) 13.214,22.473 14.02,22.473 U1.20 U1.21 ; v1(13.244,23.967) U1.23 ; U1.35 19.785,25.226 19.785,26.135 v1(19.812,26.162) ; U1.1 20.63,18.217 20.955,18.542 20.955,18.945 20.977,18.967 U1.48 v1(21.8,18.967)
pads on no net: FPC1.0 JP1.1 JP1.3 JP3.5 JP3.6 JP5.1 JP5.2 JP5.3 JP5.4 JP5.5 JP5.6 JP5.7 JP5.8 JP5.9 JP5.10 JP6.5 JP6.6 SW1.0 SW2.0 SW3.0 SW4.0 U1.4 U1.22 U1.42 U1.47 U2.4 U2.6 U3. U4.
copper on no net:
  other v2: 29.2,25.785 25.664,29.32

## Polygon pours and split planes (outlines as drawn)
DGND on Top Layer "DGND_L01_P010" (solid, pour order 10): 4.348,6.092 cw(c4.78,4.898) 6.024,4.65 ccw(c6.096,6.096) 7.493,5.715 7.493,10.176 cw(c8.509,10.176) 8.509,11.192 26.556,11.188 cw(c26.556,10.185) 27.559,10.185 27.559,5.715 ccw(c28.956,6.096) 29.028,4.65 cw(c30.271,4.901) 30.705,6.094 ccw(c17.526,17.653) 16.385,35.146 ccw(c17.526,17.653)
AGND on Top Layer "AGND_L01_P006" (solid, remove dead copper, pour order 6): 26.924,18.034 26.924,14.732 30.861,14.732 30.861,11.176 29.718,11.176 29.718,5.588 32.512,5.588 35.306,8.382 35.306,18.034
NetMOS1_2 on Top Layer "NETMOS1_2_L01_P003" (solid, pour order 3): 32.766,22.86 32.766,21.59 31.877,21.59 31.877,20.574 34.163,20.574 34.163,22.86
VBAT on Top Layer "VBAT_L01_P001" (solid, remove dead copper, pour order 1): 26.924,13.843 26.924,11.176 31.496,11.176 31.496,14.823 31.659,14.986 35.687,14.986 35.687,19.558 33.147,19.558 33.147,20.32 31.877,20.32 31.877,17.907 29.845,17.907 29.845,13.97 29.718,13.843
DGND on Bottom Layer "DGND_L04_P013" (solid, pour order 13): 4.348,6.092 cw(c4.78,4.898) 6.024,4.65 ccw(c6.096,6.096) 7.493,5.715 7.493,10.176 cw(c8.509,10.176) 8.509,11.192 26.556,11.188 cw(c26.556,10.185) 27.559,10.185 27.559,5.715 ccw(c28.956,6.096) 29.028,4.65 cw(c30.271,4.901) 30.705,6.094 ccw(c17.526,17.653) 16.385,35.146 ccw(c17.526,17.653)
AGND on Bottom Layer "AGND_L04_P004" (solid, remove dead copper, pour order 4): 26.924,18.034 26.924,14.732 30.861,14.732 30.861,11.176 29.718,11.176 29.718,5.588 32.512,5.588 35.306,8.382 35.306,18.034
AGND on Bottom Layer "AGND_L04_P008" (solid, pour order 8): 14.351,31.115 14.351,28.448 16.51,28.448 16.51,31.115
AGND on Bottom Layer "AGND_L04_P009" (solid, pour order 9): 18.669,31.115 18.669,29.972 20.701,29.972 20.701,30.226 23.368,30.226 23.368,31.115
VBAT on Bottom Layer "VBAT_L04_P002" (solid, pour order 2): 26.924,13.843 26.924,11.176 30.705,11.176 30.705,14.957 30.734,14.986 35.179,14.986 35.179,16.383 28.956,16.383 28.956,13.843
DGND on Layer 1 "DGND_L02_P011" (solid, pour order 11): 4.348,6.092 cw(c4.78,4.898) 6.024,4.65 ccw(c6.096,6.096) 7.493,5.715 7.493,10.176 cw(c8.509,10.176) 8.509,11.192 26.556,11.188 cw(c26.556,10.185) 27.559,10.185 27.559,5.715 ccw(c28.956,6.096) 29.028,4.65 cw(c30.271,4.901) 30.705,6.094 ccw(c17.526,17.653) 16.385,35.146 ccw(c17.526,17.653)
AGND on Layer 1 "AGND_L02_P005" (solid, remove dead copper, pour order 5): 26.924,18.034 26.924,14.732 30.861,14.732 30.861,11.176 29.718,11.176 29.718,5.588 32.512,5.588 35.306,8.382 35.306,18.034
DGND on Layer 2 "DGND_L03_P012" (solid, pour order 12): 4.348,6.092 cw(c4.78,4.898) 6.024,4.65 ccw(c6.096,6.096) 7.493,5.715 7.493,10.176 cw(c8.509,10.176) 8.509,11.192 26.556,11.188 cw(c26.556,10.185) 27.559,10.185 27.559,5.715 ccw(c28.956,6.096) 29.028,4.65 cw(c30.271,4.901) 30.705,6.094 ccw(c17.526,17.653) 16.385,35.146 ccw(c17.526,17.653)
AGND on Layer 2 "AGND_L03_P007" (solid, remove dead copper, pour order 7): 26.924,18.034 26.924,14.732 30.861,14.732 30.861,11.176 29.718,11.176 29.718,5.588 32.512,5.588 35.306,8.382 35.306,18.034

## Keep-outs
Keep-Out Layer:
  the board outline again, w0.127

## Silkscreen, mask and mechanical layers (free items; w line width, h text height)
Top Overlay:
  text "PWR" at 7.59,31.804 h2.54 r315
  text "Controller Board V0.3" at 8.011,25.729 h2.54
  text "RST" at 0.386,20.188 h2.54 r350
  text "IPS0.99'" at 10.883,11.176 h1.52
Mechanical 1:
  the board outline again, w0.127
Mechanical 15:
  circle w0.127: c17.533,17.653 r12.393
  circle w0.127: c17.533,17.653 r18.034